# Altium PCB MADI_ESP32-S3_PCB.PcbDoc (part 2 of 3)
Units mm, origin at the board's own origin, x right, y up, seen from the top; angles counter-clockwise.
Board outline 30 x 21.59 mm, 4 copper layers (L1, L2 (GND), L3 (GND), L4), stack 1.564 mm thick; 54 components, 48 nets, 271 pads, 173 vias.
Unrouted connection lines stored in the file: 120.
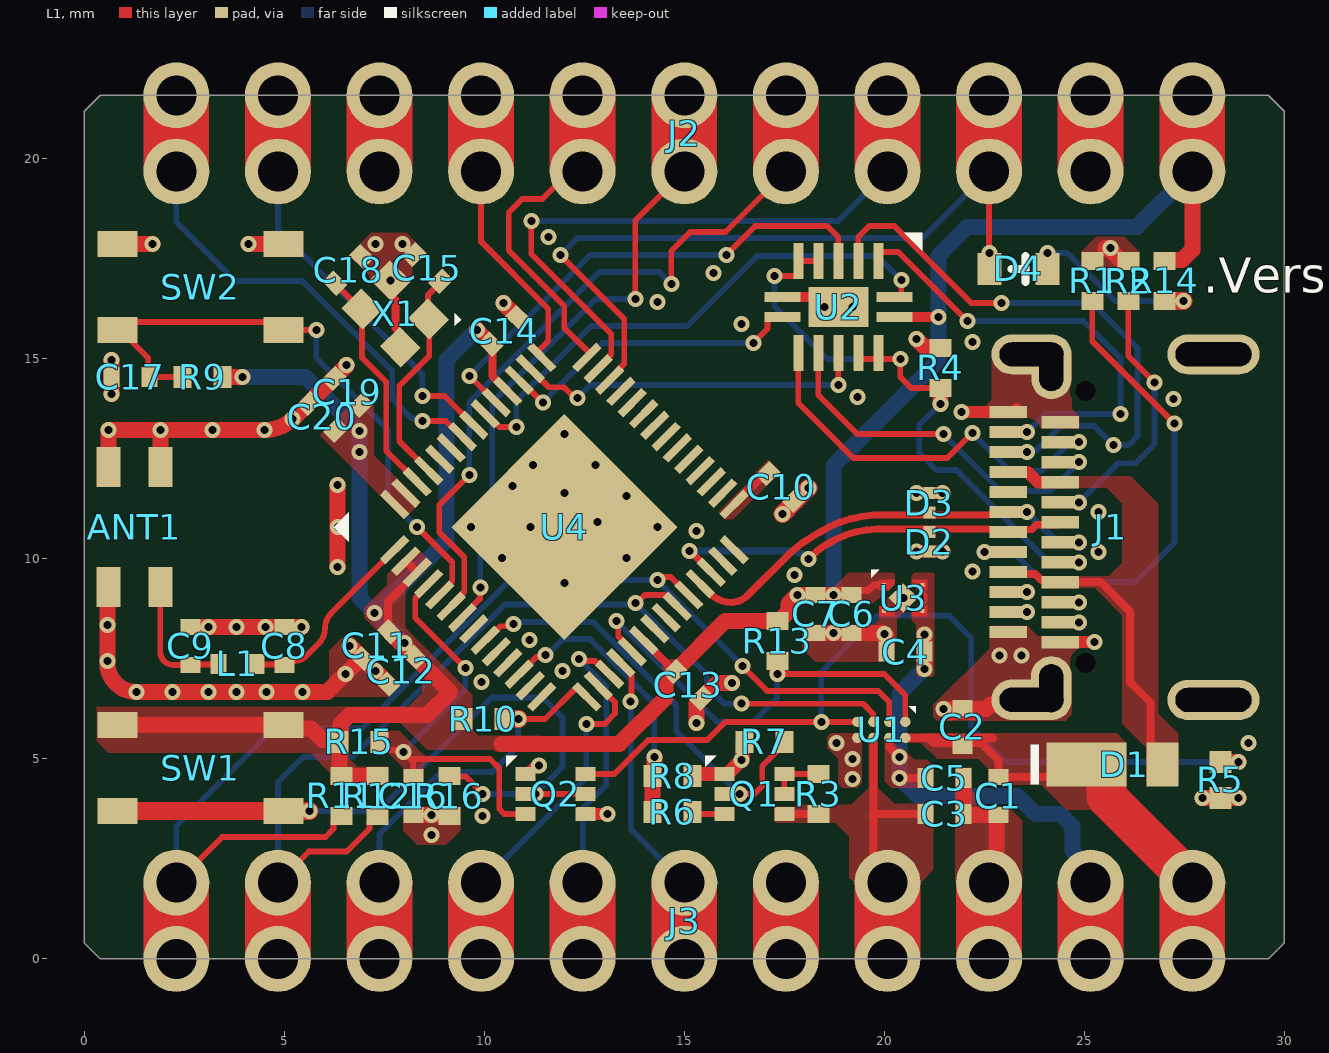
[diagram p0: L1 view]

## Part data (continued)
U3: "IC REG LINEAR 3.3V 700MA 4XDFN", Manufacturer="ON Semiconductor", Supplier Part Number 1=NCP167BMX330TBGOSCT-ND, Category="Voltage Regulators - Linear", ComponentLink1Description=http://www.farnell.com/datasheets/2711391.pdf?src-supplier=Farnell, ComponentLink1URL=http://www.farnell.com/datasheets/2711391.pdf?src-supplier=Farnell, ComponentLink2Description=https://www.onsemi.com/pub/Collateral/NCP167-D.PDF?src-supplier=Digi-Key, ComponentLink2URL=https://www.onsemi.com/pub/Collateral/NCP167-D.PDF?src-supplier=Digi-Key, ComponentLink3Description=http://www.farnell.com/datasheets/2711391.pdf?src-supplier=Newark, ComponentLink3URL=http://www.farnell.com/datasheets/2711391.pdf?src-supplier=Newark, Manufacturer Part Number=NCP167BMX330TBG, Pricing 1="1=0.61000, 10=0.52500, 25=0.49000, 100=0.39210, 250=0.36408, 500=0.30806, 1000=0.23804 (USD)", RoHS=Yes, RoHS Compliant=Yes, Stock 1=222045, Supplier 1=Digi-Key
U4: "IC RF TXRX+MCU BLUETOOTH WIFI", Manufacturer="Espressif Systems", Supplier Part Number 1=356-ESP32-S3FN8, Manufacturer Part Number=ESP32-S3FN8, Pricing 1="1=2.28000, 10=2.28000, 50=2.28000, 100=2.28000, 1000=2.28000, 10000=2.28000 (USD)", RoHS=No, Stock 1=12211, Supplier 1=Mouser
X1: library part 7D040000H01, "CRYSTAL 40.0000MHZ 9PF SMD", Frequency Stability=±20ppm, Frequency Tolerance=±10ppm, Manufacturer=HD, Category=Crystals, ComponentLink1Description=https://www.lcsc.com/product-detail/Crystals_HD-7D040000H01_C648972.html, ComponentLink1URL=https://www.lcsc.com/product-detail/Crystals_HD-7D040000H01_C648972.html, Frequency=40MHz, Manufacturer Part Number=7D040000H01, RoHS=Yes

## Via types
v1: diameter 0.4, hole 0.2, L1 to L4, tented both sides, 173 vias

## Nets (pads, with @x,y where several pads share a name; then routed paths per layer and width w, separated by ;. In a path a pad name is that pad's centre, name@x,y a point inside that pad or via, vN(x,y) a via of type N, cw(c..) or ccw(c..) an arc to the next point about the centre after c; other vN are vias at no path point)
+3V3: C6.2 C7.2 C11.2 C12.2 C13.2 C14.2 C19.2 C20.2 J2.1 R9.2 R10.2 R11.2 R12.2 R13.2 R14.2 R15.2 SW1.3 SW1.4 U2.14 U3.1 U4.2 U4.3 U4.20 U4.46 U4.55 U4.56 | length 69.5
  L1 w0.18: C6.2@19.175,9.1 19.285,9.21 19.596,9.21 19.736,9.35 U3.1@19.995,9.35
  L1 w0.2: C11.2@7.629,8.182 7.593,8.217 7.593,8.934 U4.3@8.323,9.664 U4.2@8.04,9.946 ; C14.2@10.164,15.364 10.199,15.329 10.199,14.575 U4.46@10.586,14.189 ; U4.20@13.98,7.967 14.729,7.218 C13.2@14.729,7.151
  L1 w0.25: U2.14@20.25,16.05 v1(21.35,16.05)
  L1 w0.4: SW1.4@0.725,5.85 4.875,5.85 4.962,5.763 5.662,5.763 5.95,5.475 6.35,5.475 6.375,5.45 R15.2@6.375,5.425 ; R9.2@3.45,14.55 v1(3.95,14.55) ; R12.2@7.325,4.575 6.429,4.576 6.4,4.576 6.375,4.601 R15.2@6.375,5.425 ; C11.2@7.629,8.182 9.143,6.668 8.575,6.1 6.634,6.1 6.4,5.866 6.4,5.45 R15.2@6.375,5.425 ; v1(9.811,15.729) 9.811,15.717 C14.2@10.164,15.364 ; 10.436,5.375 13.375,5.375 14.534,6.534 14.534,6.956 C13.2@14.764,7.186 ; C13.2@14.729,7.151 C13.2@14.764,7.186 ; R13.2@17.325,8.45 16.028,8.45 C13.2@14.764,7.186 ; R13.2@17.4,8.475 17.6,8.675 17.6,8.875 v1(17.825,9.1) C7.2@18.275,9.1 v1(18.725,9.1) C6.2@19.175,9.1 ; R14.2@27,17.45 27.025,17.475 27.45,17.475 27.7,17.725 J2.1@27.7,19.685
  L4 w0.25: 20.575,14.2 20.6,14.2
  L4 w0.4: v1(3.95,14.55) 5.525,14.55 v1(6.874,13.201) v1(6.875,12.675) 6.875,9.025 v1(7.25,8.65) ; v1(8,7.9) v1(7.25,8.65) ; v1(9.811,15.729) 9.05,14.967 9.05,10.45 v1(7.25,8.65) ; v1(17.825,9.1) v1(18.725,9.1) 18.725,12.325 20.6,14.2 21.35,14.95 v1(21.35,16.05) 21.35,17.575 22.075,18.3 26.315,18.3 J2.1@27.7,19.685
+VBAT: C3.2 J3.4 Q1.4 R3.2 U1.C2 | length 6
  L1 w0.2: Q1.4@17.5,3.625 R3.2@18.35,3.625 ; 19.7,3.575 19.725,3.6 ; U1.C2@19.725,5.525 19.725,3.6 ; J3.4@20.08,1.905 20.08,2.297 19.725,2.652 19.725,3.6 ; C3.2@21.025,3.625 19.75,3.625 19.725,3.6
+VBUS: D1.2 J1.A4 J1.A9 J1.B4 J1.B9 | length 9.4
  L1 w0.2: J1.A4@23.094,9.681 23.147,9.628 23.769,9.628 23.924,9.473 24.342,9.473 24.394,9.421 25.409,9.421 26.144,8.686 26.144,6.921 26.65,6.415 26.65,4.83 D1.2@26.944,4.536
  L1 w0.305: J1.A9@23.1,12.175 23.579,12.175 23.839,11.915 J1.B4@24.4,11.915
+VDD_SPI: C10.2 U4.29 | length 1.2
  L1 w0.2: U4.29@16.243,11.361 17.043,12.161 C10.2@17.064,12.161
+VIN_5V0: C1.2 C2.2 D1.1 J3.1 U1.A2 | length 11.2
  L1 w0.2: U1.A2@20.525,5.525 21.104,5.525 21.229,5.4 22.425,5.4 22.85,4.975 C1.2@22.85,4.55 24.825,4.55 D1.1@25.05,4.775
  L1 w0.23: 21.104,5.525 22.7,5.525
  L1 w1: D1.1@25.05,4.805 25.55,4.805 25.55,4.055 J3.1@27.7,1.905
+VSYS: C4.2 C5.2 J3.2 U1.B2 U3.3 U3.4 | length 12.9
  L1 w0.1: U3.3@20.955,8.7 20.955,8.869 21.033,8.946 21.033,9.104 20.955,9.181 U3.4@20.955,9.35
  L1 w0.2: U1.B2@20.125,5.525 20.131,5.519 20.131,5.287 v1(20.375,5.043) ; 20.6,4.525 C5.2@21.025,4.525
  L1 w0.4: v1(21,7.25) v1(21,8.109)
  L4 w0.4: v1(21,8.109) v1(21,7.25) 20.375,6.625 v1(20.375,5.043) v1(20.375,4.525) 20.825,4.075 23.328,4.075 23.786,3.617 24.408,3.617 24.702,3.323 24.702,2.701 25.16,2.243 J3.2@25.16,1.905
GND: ANT1.2 ANT1.3 ANT1.4 C1.1 C2.1 C3.1 C4.1 C5.1 C6.1 C7.1 C8.1 C9.1 C10.1 C11.1 C12.1 C13.1 C14.1 C15.2 C16.1 C17.1 C18.2 C19.1 C20.1 D2.2 D3.2 J1.A1 J1.A12 J1.B1 J1.B12 J1.S1 J1.S2 J1.S3 J1.S4 J2.2 J2.9 J3.3 J3.5 Q1.1 Q2.1 Q2.4 R1.1 R2.1 R4.1 R5.1 R7.1 R8.1 R16.1 SW2.3 SW2.4 U1.D2 U2.7 U2.15 U3.2 U3.5 U4.57 X1.2 X1.4 | length 50.4
  L1 w0.2: v1(7.651,16.956) 7.651,16.602 7.775,16.479 7.775,15.771 7.899,15.648 X1.4@7.899,15.294
  L1 w0.25: U2.7@17.45,16.55 18.6,16.55 U2.15@18.85,16.3
  L1 w0.3: Q2.1@11.025,4.625 11.1,4.625 11.293,4.818 11.343,4.818 v1(11.362,4.837) ; Q2.4@12.525,3.625 v1(13.075,3.625) ; v1(20.8,10.185) v1(21.45,10.185) ; v1(20.8,11.65) v1(21.45,11.65) ; v1(21.925,13.675) J1.A12@23.1,13.675 ; J1.A12@23.3,13.75 J1.A12@23.302,13.748 ; J1.B12@24.4,7.915 24.402,7.917 25.242,7.917 v1(25.25,7.925)
  L1 w0.35: R8.1@15.2,4.575 15.25,4.625 16.075,4.625 v1(16.425,4.975) 16.425,4.989 16.45,5.014 16.45,5.375 R7.1@16.5,5.425
  L1 w0.4: ANT1.4@0.6,9.295 0.575,9.27 v1(0.575,8.35) v1(0.575,7.45) 0.575,7.4 ccw(c1.3,7.4) v1(1.3,6.675) v1(2.2,6.675) v1(3.1,6.675) v1(3.8,6.675) v1(4.55,6.675) v1(5.45,6.675) 6.075,6.675 v1(6.525,7.125) 6.539,7.125 C11.1@6.94,7.527 ; ANT1.3@0.6,12.295 v1(0.6,13.225) v1(1.9,13.225) ; v1(0.675,14.125) v1(0.675,14.975) ; SW2.4@0.825,17.875 v1(1.7,17.875) ; ANT1.2@1.9,12.295 v1(1.9,13.225) ; C9.1@2.65,8.3 v1(3.1,8.3) v1(3.8,8.3) v1@4.45,8.3 ; v1(4.1,17.875) SW2.3@4.975,17.875 ; v1@4.625,8.3 v1(4.525,8.3) v1(5.425,8.3) C8.1@5.05,8.3 ; v1(5.2,13.5) cw(c4.536,14.164) 4.67,13.235 cw(c4.536,14.164) 4.536,13.225 v1(4.5,13.225) v1(3.2,13.225) v1(1.9,13.225) ; v1@5.214,13.486 C19.1@6.241,14.513 6.54,14.812 6.54,14.84 v1(6.55,14.85) ; v1(6.325,9.8) v1(6.325,11.85) ; v1(6.625,7.825) 6.635,7.815 6.652,7.815 C11.1@6.94,7.527 ; C12.1@7.593,6.874 C11.1@6.94,7.527 ; C16.1@8.225,3.6 v1(8.675,3.6) 9.1,3.6 R16.1@9.125,3.575 ; v1(10.475,16.397) C14.1@10.836,16.036 ; v1(15.3,5.9) 15.3,6.378 C13.1@15.436,6.514 15.822,6.9 v1(16.187,6.9) ; C7.1@18.275,8.15 v1(18.725,8.15) C6.1@19.175,8.15 19.961,8.15 19.986,8.125 v1(20,8.125) 20.05,8.075 C4.1@20.05,7.68 ; v1(20.8,15.5) 21,15.3 21.375,15.3 R4.1@21.4,15.275 ; v1(21.475,6.25) 22.547,6.25 22.656,6.359 23.318,6.359 J1.S3@23.681,6.722 ; C3.1@21.975,3.6 C1.1@22.8,3.6 ; C3.1@21.975,3.625 C5.1@21.975,4.525 ; J3.3@22.62,1.905 22.8,2.085 C1.1@22.8,3.6 ; C1.1@22.85,3.6 C1.1@22.8,3.6 ; v1@25.525,17.775 25.535,17.765 25.61,17.765 25.925,17.45 R2.1@25.975,17.45 ; v1(27.95,4.025) R5.1@28.4,4.025 v1(28.85,4.025)
  L1 w0.45: v1(17.45,11.125) 17.772,11.447 17.772,11.453 17.778,11.453 v1(18.1,11.775)
  other v1: 8.675,3.1 9.95,3.575 19.2,4.5 19.2,5 18.8,5.4 29.1,5.4 9.925,6.925 7.275,7.2 11.95,7.2 22.881,7.59 23.431,7.59 11.125,7.975 20.475,9.025 12,9.4 17.75,9.6 22.2,9.68 10.444,10.017 13.556,10.017 25.35,10.175 15.3,10.7 6.337,10.793 9.667,10.795 11.15,10.795 14.333,10.795 12.825,10.925 25.35,11.175 13.556,11.573 12,11.65 10.7,11.825 11.222,12.351 12.778,12.351 12,13.128 27.225,14 19.325,14.05 22.2,15.425 16.425,15.875 18.5,16.3 19.2,16.3 14.325,16.425 15.725,17.15 25.65,17.775 7.275,17.875 7.95,17.875 11.6,18.05
IO0: C17.2 R9.1 SW2.1 SW2.2 U4.5 | length 15.9
  L1 w0.146: R9.1@2.45,14.55 C17.2@1.625,14.55 1.6,14.575 1.6,15.025 0.9,15.725 0.725,15.725 0.925,15.925 4.675,15.925 4.875,15.725 v1(5.8,15.725) ; v1(8.323,10.795) 9.2,9.918 9.2,9.445 8.889,9.133 U4.5@8.889,9.098
  L4 w0.146: v1(5.8,15.725) 5.8,15.025 7.6,13.225 7.6,11.518 v1(8.323,10.795)